# Altium PCB Main_PCB.PcbDoc
Units mm, origin at the board's own origin, x right, y up, seen from the top; angles counter-clockwise.
Board outline 55 x 55 mm, 2 copper layers (Top Layer, Bottom Layer), stack 1.58 mm thick; 49 components, 43 nets, 226 pads, 14 vias.
Unrouted connection lines stored in the file: 8.
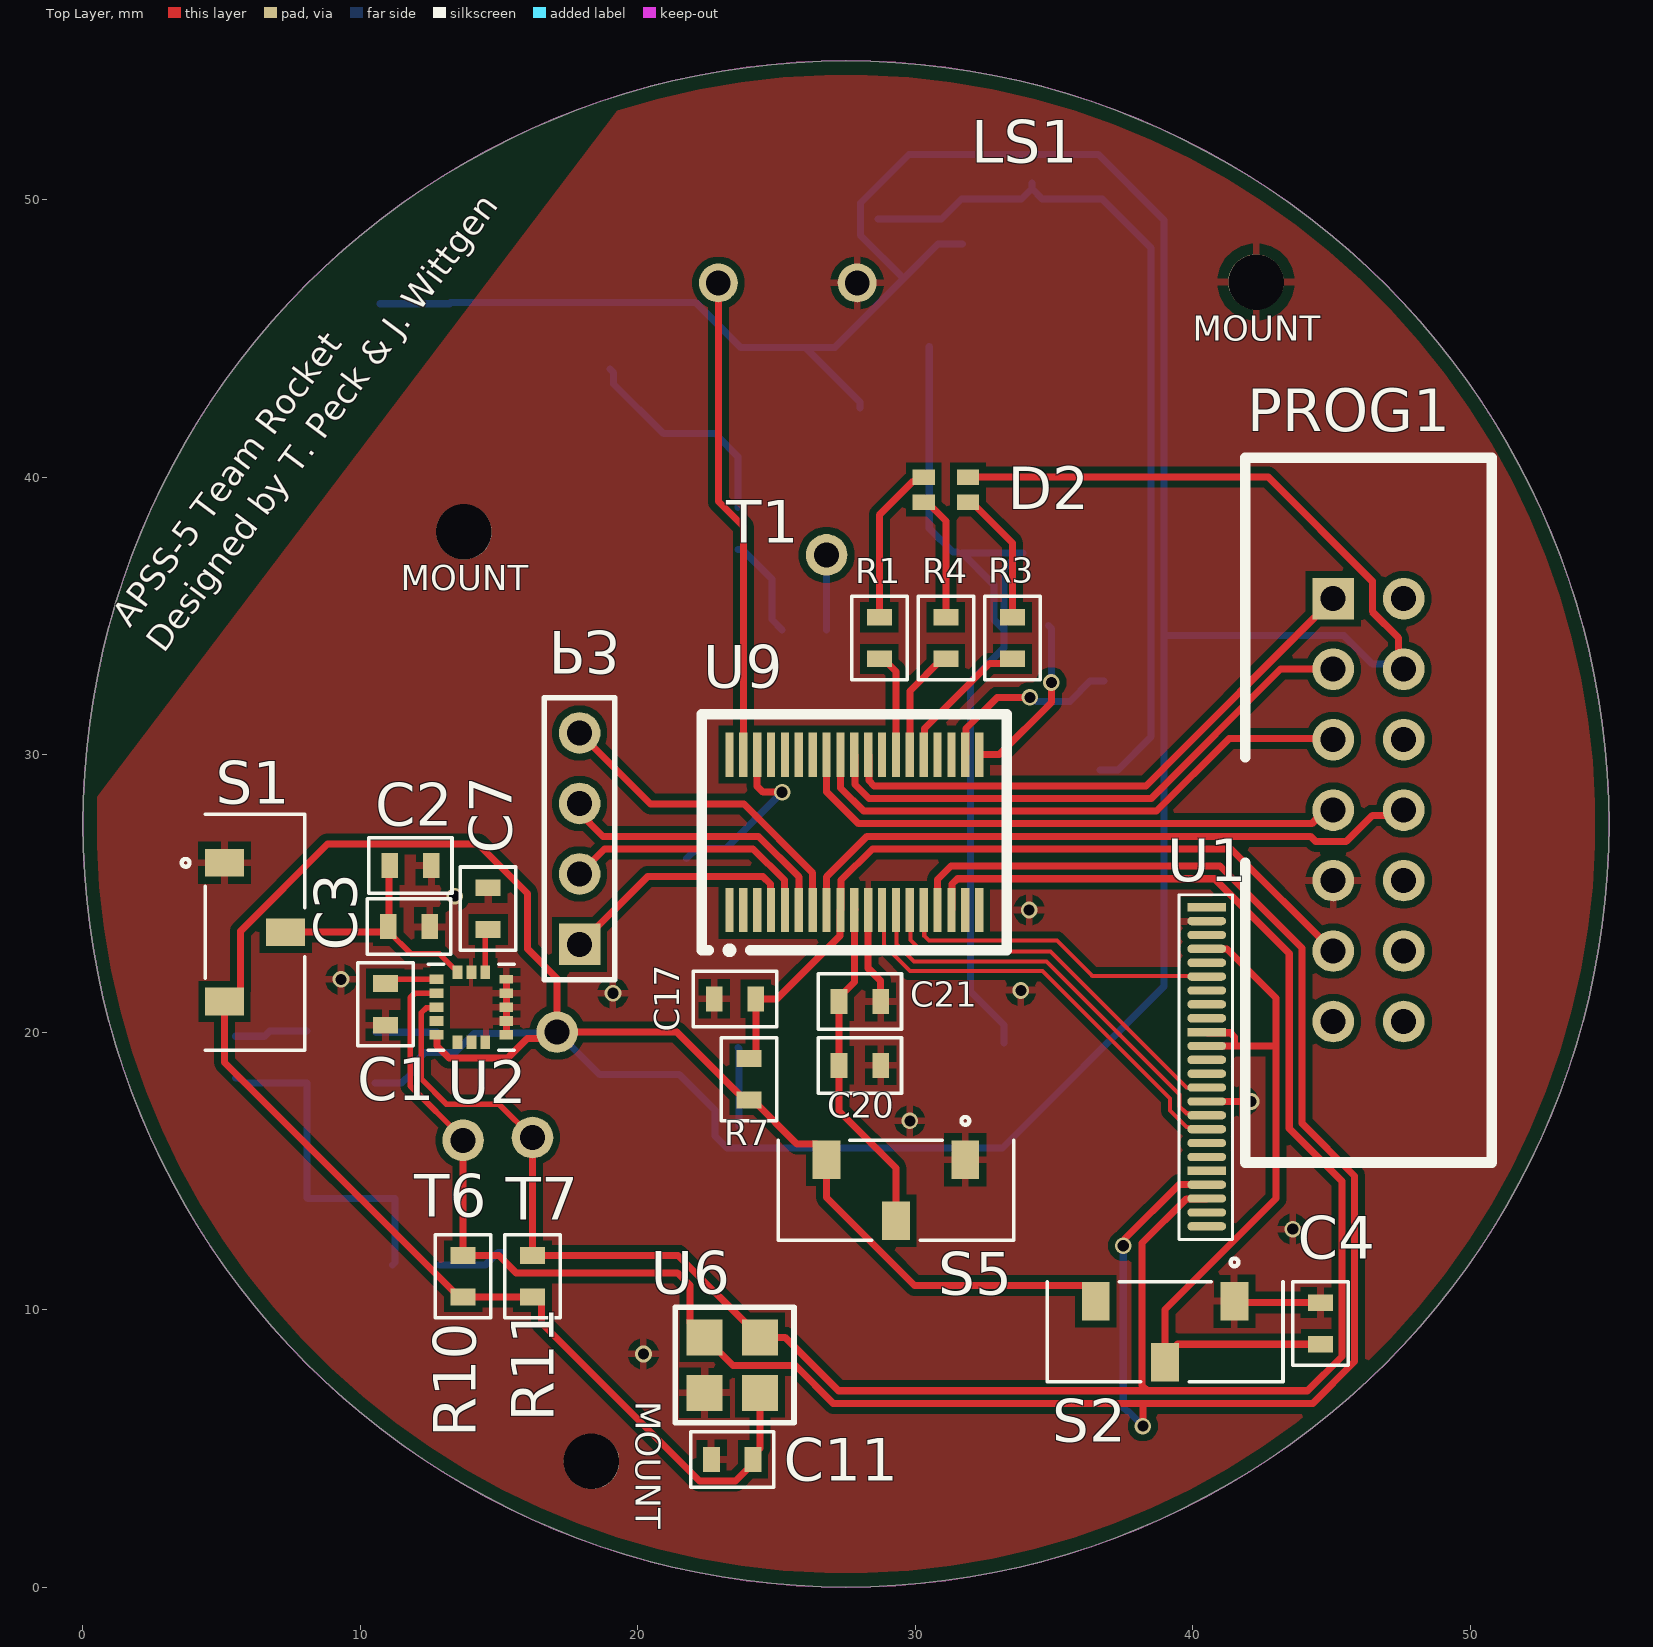
[diagram p0: Top Layer view]
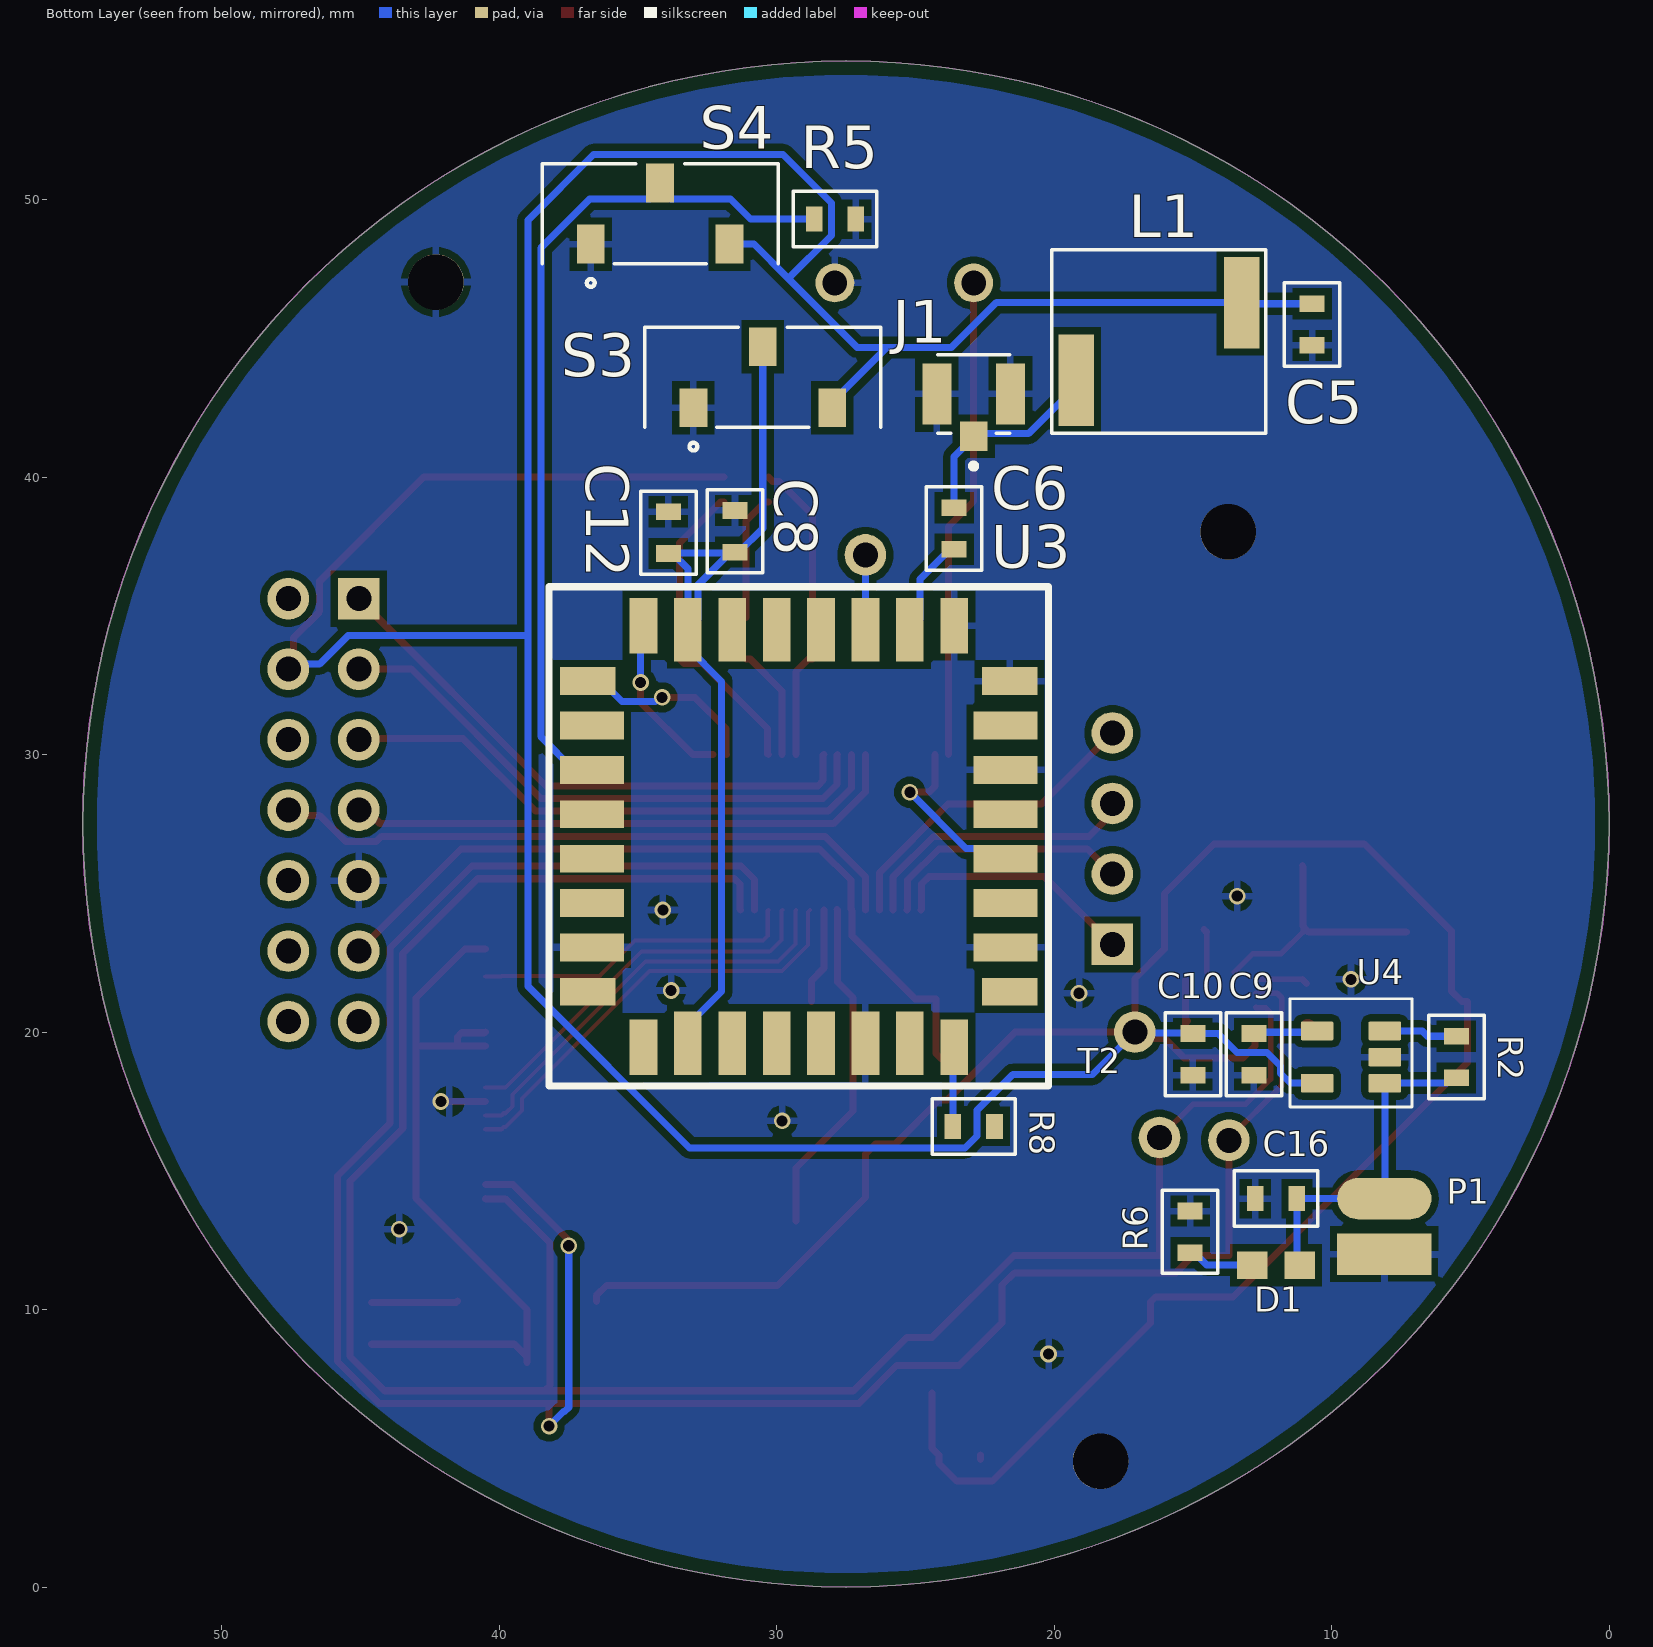
[diagram p1: Bottom Layer view, seen from below]

## Layer stack, top to bottom
Top Solder: solder mask 0.0102, Solder Resist, Dk 3.5
Top Layer: signal copper 0.0356
Dielectric 1: dielectric 1.5086, FR-4, Dk 4.8
Bottom Layer: signal copper 0.0356
Bottom Solder: solder mask 0.0102, Solder Resist, Dk 3.5

## Board outline
27.5,0 cw(c27.5,27.5) 0,27.5 cw(c27.5,27.5) 27.5,55 cw(c27.5,27.5) 55,27.5 cw(c27.5,27.5)

## Design rules (kind name [scope] priority, off if disabled: settings)
BoardOutlineClearance [All] p1: gap=0.5 ignorepadtopadclearanceinfootprint=FALSE
Clearance [All] p1: gap=0.254 ignorepadtopadclearanceinfootprint=FALSE except(0: Arc-Hole Track-Hole SMDPad-Hole THPad-Hole Via-Hole Fill-Hole Poly-Hole Region-Hole Text-Hole; 0.15: SMDPad-SMDPad; 0.2: Arc-Arc Arc-Track Arc-SMDPad Track-Track Track-SMDPad)
ComponentClearance [All] p1: gap=0.254 collisioncheckmode=3 verticalgap=0 showdistances=FALSE
MinimumSolderMaskSliver [All] p1: minsoldermaskwidth=0.1
PolygonConnect [All] p1: connectstyle=Relief reliefconductorwidth=0.254 reliefentries=4 polygonreliefangle="90 Angle" airgapwidth=0.254
RoutingVias [All] p1: holewidth=0.711 width=1.27 viastyle="Through Hole" minholewidth=0.711 minwidth=1.27 maxholewidth=0.711 maxwidth=1.27
SilkToSilkClearance [All] p1: silktosilkclearance=0.1
SilkToSolderMaskClearance [IsPad] p1: minsilkscreentomaskgap=0.1 clearancetoexposedcopper=TRUE
SolderMaskExpansion [All] p1: expansion=0.102 istentingtop=FALSE
Width [All] p1: maxlimit=0.5 minlimit=0.15 preferedwidth=0.254 bottomlayer_maxwidth=0.254 minimp=50.000000 maximp=50.000000 favimp=50.000000
26 further rules are at their usual default settings.

## Classes and differential pairs
component class GNNS_Module: C5 C6 C8 C12 J1 L1 R5 R8 S3 S4 T1 U3
component class Microcontroller: C1 C2 C3 C4 C7 C9 C10 C11 C16 C17 C20 C21 D1 LS1 P1 P3 PROG1 R1 R2 R3 R4 R6 R7 R10 R11 S1 S2 S5 T2 T6 T7 U1 U2 U4 U6 U9

## Components (designator, comment, footprint, x,y, rotation, side; value= is the part's Value field where it differs from the comment)
C1 "C-n-010.000-5-0603" "0603 (Capacitor)" 10.9,21 r270 top value=10nF
C2 "C-n-001.000-5-0603" "0603 (Capacitor)" 11.8,26 r0 top value=1uF
C3 "C-n-001.000-5-0603" "0603 (Capacitor)" 11.75,23.8 r0 top value=2.2uF
C4 "C-n-100.000-10-0603" "0603 (Capacitor)" 44.6,9.5 r270 top value=100nF
C5 "C-p-012.000-2-0603" "0603 (Capacitor)" 10.7,45.5 r270 bottom value=27pF
C6 "C-p-012.000-2-0603" "0603 (Capacitor)" 23.6,38.15 r270 bottom value=27pF
C7 "C-n-010.000-5-0603" "0603 (Capacitor)" 14.6,24.45 r90 top value=0.47uF
C8 "C-n-010.000-5-0603" "0603 (Capacitor)" 31.5,38.05 r90 bottom value=2.2uF
C9 "C-n-001.000-5-0603" "0603 (Capacitor)" 12.8,19.2 r270 bottom value=22nF
C10 "C-n-001.000-5-0603" "0603 (Capacitor)" 15,19.2 r270 bottom value=1uF
C11 "C-n-010.000-5-0603" "0603 (Capacitor)" 23.4,4.6 r180 top value=10nF
C12 "C-n-001.000-5-0603" "0603 (Capacitor)" 33.9,38 r90 bottom value=0.1uF
C16 "C-n-001.000-5-0603" "0603 (Capacitor)" 12,14 r0 bottom value=1uF
C17 "C-n-002.200-5-0603" "0603 (Capacitor)" 23.5,21.2 r180 top value=2.2nF
C20 "C-n-001.000-5-0603" "0603 (Capacitor)" 28,18.8 r0 top value=10uF
C21 "C-n-100.000-10-0603" "0603 (Capacitor)" 28,21.1 r0 top value=100nF
D1 "LTST-C194TBKT" 0603 12,11.6 r180 bottom
D2 "EAST1616RGBB4" "EAST1616RGBB4 - DUPLICATE1" 31.1,39.55 r0 top
J1 "CONUFL001-SMD-T" "ANTENNA- CONUFL001-SMD-T" 22.9,43 r180 bottom
L1 "L-n-027.000-5-0402" 4426R-9 13.24,46.29 r270 bottom value=27nH
LS1 "PS1440P02BT" BUZZER_PS1440P02BT 25.4,47 r90 top
P1 "Header 2" "BATTERY CONNECTOR- 620102131822" 8.1,12 r90 bottom
P3 "SD Breakout" HDR1X4 17.9,23.16 r90 top
PROG1 "MSP430 Programming Header" "TE 2-1761603-5" 46.33,28 r90 top
R1 "R-k-010.000-1-0603" "0603 (Resistor)" 28.7,34.2 r90 top value=60
R2 "R-k-100.000-1-0603" "0603 (Resistor)" 5.5,19.1 r270 bottom value=100k
R3 "R-k-010.000-1-0603" "0603 (Resistor)" 33.5,34.2 r90 top value=10
R4 "R-k-010.000-1-0603" "0603 (Resistor)" 31.1,34.2 r90 top value=10
R5 "R-k-100.000-1-0603" "0603 (Resistor)" 27.9,49.3 r180 bottom value=100k
R6 "R-k-001.500-1-0603" "0603 (Resistor)" 15.1,12.8 r270 bottom value=20
R7 "R-k-047.000-1-0603" "0603 (Resistor)" 24,18.3 r90 top value=47k
R8 "R-k-010.000-1-0603" "0603 (Resistor)" 22.9,16.6 r180 bottom value=10k
R10 "R-k-010.000-1-0603" "0603 (Resistor)" 13.7,11.2 r270 top value=10k
R11 "R-k-010.000-1-0603" "0603 (Resistor)" 16.2,11.2 r270 top value=10k
S1 "JS102011JCQN" SW_JS102011JCQN 6.2,23.6 r270 top
S2 "JS102011JCQN" SW_JS102011JCQN 39,9.2 r180 top
S3 "JS102011JCQN" SW_JS102011JCQN 30.5,43.6 r180 bottom
S4 "JS102011JCQN" SW_JS102011JCQN 34.2,49.5 r180 bottom
S5 "JS102011JCQN" SW_JS102011JCQN 29.3,14.3 r180 top
T1 "Open Pad" "OPEN PAD" 26.8,37.2 r0 top
T2 "Open Pad" "OPEN PAD" 17.088,20 r180 bottom
T6 "Open Pad" "OPEN PAD" 13.7,16.1 r0 top
T7 "Open Pad" "OPEN PAD" 16.2,16.2 r0 top
U1 "Camera" SFV24R-2STE1HLF 40.5,24.5 r270 top
U2 "ICM-20608-G" ICM-20608-G 14,20.9 r0 top
U3 "SE878K3-A" "GNSS MODULE" 29.2,27.05 r180 bottom
U4 "RT9193-30GB" RT9193-33GB 9.3,19.1 r0 bottom
U6 "MS563702BA03-50" MS5837-30BA 24.4,9 r0 top
U9 "MSP430FR2355 38-TFSOP" "MSP430FR2355 38-TFSOP" 27.8,27.2 r0 top

## Footprints (in the part's own frame and the unit in brackets; to place one, negate y for a bottom-side part, rotate by r counter-clockwise, add the part's x,y. Pads: shape width x height; smd on the part's side, far side on the other; paste and mask are expansions set on the pad)
0603 [mm]
  rect 1.1x1 smd: 1(-0.85,0) 2(0.85,0)
"0603 (Capacitor)" [mm]
  rect 0.6x0.9 smd mask+0.05: 1(-0.75,0) 2(0.75,0)
  silkscreen extent -1.5,-1 1.5,1, body extent -0.77,-0.42 0.78,0.43, height 0.45
"0603 (Resistor)" [mm]
  rect 0.6x0.9 smd mask+0.05: 1(-0.75,0) 2(0.75,0)
  silkscreen extent -1.5,-1 1.5,1, body extent -0.77,-0.42 0.78,0.43, height 0.45
4426R-9 [mm] "Inductor"
  rect 3.3x1.27 smd: 1(0,0) 2(2.79,-5.96)
  silkscreen extent -1.9,-6.85 4.7,0.87
"ANTENNA- CONUFL001-SMD-T" [mm]
  rect 1x1.05 smd: 1(0,-1.525)
  rect 1.05x2.2 smd: 2(-1.325,0) 3(1.325,0)
  silkscreen extent -1.3,-2.7 1.3,1.42
"BATTERY CONNECTOR- 620102131822" [mm]
  rect 1.5x3.4 smd: 1(0,0)
  oval 1.5x3.4 smd: 2(2,0)
BUZZER_PS1440P02BT [mm]
  round 1.398 hole 0.89: 1(0,2.5) 2(0,-2.5)
"EAST1616RGBB4 - DUPLICATE1" [mm]
  rect 0.8x0.55 smd: 1(-0.8,-0.45) 2(-0.8,0.45) 3(0.8,0.45) 4(0.8,-0.45)
"GNSS MODULE" [mm]
  rect 2x1 smd mask+0.1: 1(-7.6,5.6) 8(-7.6,-5.6) 17(7.6,-5.6) 24(7.6,5.6)
  rect 2.3x1 smd mask+0.1: 2(-7.45,4) 3(-7.45,2.4) 4(-7.45,0.8) 5(-7.45,-0.8) 6(-7.45,-2.4) 7(-7.45,-4) 18(7.45,-4) 19(7.45,-2.4) 20(7.45,-0.8) 21(7.45,0.8) 22(7.45,2.4) 23(7.45,4)
  rect 1x2 smd mask+0.1: 9(-5.6,-7.6) 16(5.6,-7.6) 25(5.6,7.6) 32(-5.6,7.6)
  rect 1x2.3 smd mask+0.1: 10(-4,-7.45) 11(-2.4,-7.45) 12(-0.8,-7.45) 13(0.8,-7.45) 14(2.4,-7.45) 15(4,-7.45) 26(4,7.45) 27(2.4,7.45) 28(0.8,7.45) 29(-0.8,7.45) 30(-2.4,7.45) 31(-4,7.45)
  silkscreen extent -9,-9 9,9, body extent -9,-9 9,9, height 6.2
HDR1X4 [mm] "Connector; Header; 4 Position"
  rect 1.5x1.5 hole 0.9: 1(0,0)
  round 1.5 hole 0.9: 2(2.54,0) 3(5.08,0) 4(7.62,0)
  silkscreen extent -1.27,-1.27 8.89,1.27
ICM-20608-G [mm]
  rect 0.49x0.35 smd: 1(-1.26,1) 2(-1.26,0.5) 3(-1.26,0) 4(-1.26,-0.5) 5(-1.26,-1) 9(1.26,-1) 10(1.26,-0.5) 11(1.26,0) 12(1.26,0.5)
  rect 0.35x0.49 smd: 6(-0.5,-1.26) 7(0,-1.26) 8(0.5,-1.26) 14(0.5,1.26) 15(0,1.26) 16(-0.5,1.26)
  rect 0.49x0.3 smd: 13(1.26,1)
  silkscreen extent -1.55,-1.55 1.55,1.55, body extent -1.5,-1.5 1.5,1.5, height 0.8
MS5837-30BA [mm]
  rect 1.3x1.3 smd: 1(-2,0) 2(-2,-2) 3(0,-2) 4(0,0)
  silkscreen extent -3.05,-3.08 1.22,1.07
"MSP430FR2355 38-TFSOP" [mm]
  rect 0.3x1.6 smd paste-0.025 mask+0.05: 1(-4.5,-2.8) 2(-4,-2.8) 3(-3.5,-2.8) 4(-3,-2.8) 5(-2.5,-2.8) 6(-2,-2.8) 7(-1.5,-2.8) 8(-1,-2.8) 9(-0.5,-2.8) 10(0,-2.8) 11(0.5,-2.8) 12(1,-2.8) 13(1.5,-2.8) 14(2,-2.8) 15(2.5,-2.8) 16(3,-2.8) 17(3.5,-2.8) 18(4,-2.8) 19(4.5,-2.8) 20(4.5,2.8) 21(4,2.8) 22(3.5,2.8) 23(3,2.8) 24(2.5,2.8) 25(2,2.8) 26(1.5,2.8) 27(1,2.8) 28(0.5,2.8) 29(0,2.8) 30(-0.5,2.8) 31(-1,2.8) 32(-1.5,2.8) 33(-2,2.8) 34(-2.5,2.8) 35(-3,2.8) 36(-3.5,2.8) 37(-4,2.8) 38(-4.5,2.8)
  silkscreen extent -5.5,-4.37 5.5,4.25, body extent -4.9,-2.2 4.9,2.2, height 1.2
"OPEN PAD" [mm]
  round 1.5 hole 0.9: 1(0,0)
RT9193-33GB [mm]
  rrect12% 1.17x0.67 smd: 1(-1.22,0.94) 2(-1.22,0) 3(-1.22,-0.94) 4(1.22,-0.94) 5(1.22,0.94)
  silkscreen extent -2.2,-2.1 2.2,1.8
SFV24R-2STE1HLF [mm]
  rect 0.3x1.4 smd: 1(0,0) 10(4.5,0) 20(9.5,0)
  oval 0.3x1.4 smd: 2(0.5,0) 3(1,0) 4(1.5,0) 5(2,0) 6(2.5,0) 7(3,0) 8(3.5,0) 9(4,0) 11(5,0) 12(5.5,0) 13(6,0) 14(6.5,0) 15(7,0) 16(7.5,0) 17(8,0) 18(8.5,0) 19(9,0) 21(10,0) 22(10.5,0) 23(11,0) 24(11.5,0)
  silkscreen extent -0.45,-1 11.98,0.92
SW_JS102011JCQN [mm]
  rect 1x1.4 smd: 1(-2.5,-1.1) 2(0,1.1) 3(2.5,-1.1)
  silkscreen extent -4.25,-2.64 4.25,1.8
"TE 2-1761603-5" [mm] "14 Pin, 100mm, 2 Row"
  rect 1.5x1.5 hole 0.9 mask-0.1: 1(7.62,1.27)
  round 1.5 hole 0.9 mask-0.1: 2(7.62,-1.27) 3(5.08,1.27) 4(5.08,-1.27) 5(2.54,1.27) 6(2.54,-1.27) 7(0,1.27) 8(0,-1.27) 9(-2.54,1.27) 10(-2.54,-1.27) 11(-5.08,1.27) 12(-5.08,-1.27) 13(-7.62,1.27) 14(-7.62,-1.27)
  silkscreen extent -12.7,-4.45 12.7,4.45, body extent -12.7,-4.78 12.7,4.45, height 8.9

## Part data
C1 C11: "Capacitor 10nF 0603 +/-5%", Case/Package=0603, Manufacturer=Murata, Manufacturer PartNo=GRM1885C1H103JA01D, Tolerance=+/-5%
C2 C10 C16: "Capacitor 1uF 0603 +/-5%", Case/Package=0603, Manufacturer=Murata, Manufacturer PartNo=GCM1885C2A102JA16D, Tolerance=+/-5%
C3: "Capacitor 2,2uF 0603 +/-5%", Case/Package=0603, Manufacturer=Murata, Manufacturer PartNo=GCM1885C2A102JA16D, Tolerance=+/-5%
C4 C21: "Capacitor 100nF 0603 +/-10%", Case/Package=0603, Manufacturer=Murata, Manufacturer PartNo=GRM188R72A104KA35D, Tolerance=+/-10%
C5 C6: "Capacitor 12pF 0603 +/-2%", Case/Package=0603, Manufacturer=Murata, Manufacturer PartNo=GQM1875C2E120GB12D, Tolerance=+/-2%
C7: "Capacitor 0.47uF 0603 +/-5%", Case/Package=0603, Manufacturer=Murata, Manufacturer PartNo=GRM1885C1H103JA01D, Tolerance=+/-5%
C8: "Capacitor 2.2uF 0603 +/-5%", Case/Package=0603, Manufacturer=Murata, Manufacturer PartNo=GRM1885C1H103JA01D, Tolerance=+/-5%
C9: "Capacitor 22nF 0603 +/-5%", Case/Package=0603, Manufacturer=Murata, Manufacturer PartNo=GCM1885C2A102JA16D, Tolerance=+/-5%
C12: "Capacitor 0.1uF 0603 +/-5%", Case/Package=0603, Manufacturer=Murata, Manufacturer PartNo=GCM1885C2A102JA16D, Tolerance=+/-5%
C17: library part C-n-001.000-5-0603, "Capacitor 2.2nF 0603 +/-5%", Case/Package=0603, Manufacturer=Murata, Manufacturer PartNo=GCM1885C2A102JA16D, Tolerance=+/-5%
C20: "Capacitor 10uF 0603 +/-5%", Case/Package=0603, Manufacturer=Murata, Manufacturer PartNo=GCM1885C2A102JA16D, Tolerance=+/-5%
D1: "Blue 468nm LED Indication - Discrete 3.3V 0603 _1608 Metric_", Package="0603 Lite-On", Digi-Key_Part_Number=160-1837-1-ND, Digi-Key_Purchase_URL=https://www.digikey.com/product-detail/en/lite-on-inc/LTST-C194TBKT/160-1837-1-ND/2356236?utm_source=snapeda&utm_medium=aggregator&utm_campaign=symbol, MF="Lite-On Inc.", MP=LTST-C194TBKT, SnapEDA_Link=https://www.snapeda.com/parts/LTST-C194TBKT/Lite-On%20Inc./view-part/426592/?ref=snap
J1: Package=None, Availability=Unavailable, MP=CONUFL001-SMD-T, Price=None
L1: "Inductor 27nH 0402 +/-5%", Case/Package=0402, Manufacturer=Murata, Manufacturer PartNo=LQG15HS27NJ02D, Tolerance=+/-5%
LS1: "Buzzers Transducer, Externally Driven Piezo 3V 4kHz 75dB @ 3V, 10cm Through Hole PC Pins", Package="SOP-8 TDK", Digi-Key_Part_Number=445-5242-1-ND, Digi-Key_Purchase_URL=https://www.digikey.com/product-detail/en/tdk-corporation/PS1440P02BT/445-5242-1-ND/2236832?utm_source=snapeda&utm_medium=aggregator&utm_campaign=symbol, MF=TDK, MP=PS1440P02BT, SnapEDA_Link=https://www.snapeda.com/parts/PS1440P02BT/TDK/view-part/295705/?ref=snap
P1: "Header, 2-Pin", LatestRevisionDate=17-Jul-2002, LatestRevisionNote="Re-released for DXP Platform.", Publisher="Altium Limited"
P3: library part "Header 4", "Header, 4-Pin", LatestRevisionDate=17-Jul-2002, LatestRevisionNote="Re-released for DXP Platform.", Publisher="Altium Limited"
PROG1: "14 Pin JTAG Header for MSP430 Debug Probe", Manufacturer="TE Connectivity", Manufucturer PartNo=2-1761603-5
R1: "Resistor 60 0603 +/-1%", Case/Package=0603, Manufacturer="Vishay Dale", Manufacturer PartNo=CRCW060310K0FKEAHP, Tolerance=+/-1%
R2 R5: "Resistor 100k 0603 +/-1%", Case/Package=0603, Manufacturer="Vishay Dale", Manufacturer PartNo=CRCW0603100KFKEAHP, Tolerance=+/-1%
R3 R4: "Resistor 10 0603 +/-1%", Case/Package=0603, Manufacturer="Vishay Dale", Manufacturer PartNo=CRCW060310K0FKEAHP, Tolerance=+/-1%
R6: "Resistor 20 0603 +/-1%", Case/Package=0603, Manufacturer="Vishay Dale", Manufacturer PartNo=CRCW06031K50FKEAHP, Tolerance=+/-1%
R7: library part R-k-068.000-1-0603, "Resistor 47k 0603 +/-1%", Case/Package=0603, Manufacturer="Vishay Dale", Manufacturer PartNo=CRCW060368K0FKEAHP, Tolerance=+/-1%
R8 R10 R11: "Resistor 10k 0603 +/-1%", Case/Package=0603, Manufacturer="Vishay Dale", Manufacturer PartNo=CRCW060310K0FKEAHP, Tolerance=+/-1%
S1 S2 S3 S4 S5: "Switch Slide Spdt 300ma 6v", Package=None, Availability=Unavailable, MP=JS102011JCQN, Price=None
U2: "Accelerometer, Gyroscope, 6 Axis Sensor IÂ²C, SPI Output", Package="LGA-16 InvenSense", Availability=Good, MF="TDK InvenSense", MP=ICM-20608-G, Price=None, Purchase-URL=https://pricing.snapeda.com/search/part/ICM-20608-G/?ref=eda, SnapEDA_Link=https://www.snapeda.com/parts/ICM-20608-G/TDK%20InvenSense/view-part/196551/?ref=snap
U3: "GNSS L1 Antenna module (GPS, Galileo, Glonass, BeiDou)", Package="NON-STANDARD-32 Telit", Availability="Not in stock", Check_prices=https://www.snapeda.com/parts/SE878K3-A/Telit/view-part/?ref=eda, MF=Telit, MP=SE878K3-A, Price=None, SnapEDA_Link=https://www.snapeda.com/parts/SE878K3-A/Telit/view-part/?ref=snap
U4: library part RT9193-33GB, "Linear Voltage Regulator IC 1 Output 300mA SOT-23-5", Package="SOT-23-5 Richtek", Availability=Unavailable, MF="Richtek USA", MP=RT9193-33GB, Price=None, SnapEDA_Link=https://www.snapeda.com/parts/RT9193-33GB/Richtek%20USA%20Inc./view-part/55570/?ref=snap
U6: library part MS5837-02BA21, "Pressure Sensor, Absolute, 2Bar, I2C", Case/Package=SMD/SMT, Manufacturer="TE Connectivity", Max Operating Temperature=85°C, Min Operating Temperature=-20°C, Operating Pressure=17.4PSI, ComponentLink1Description=https://www.te.com/commerce/DocumentDelivery/DDEController?Action=srchrtrv&amp;DocNm=MS5837-02BA01&amp;DocType=DS&amp;DocLang=English&src-supplier=Digi-Key, ComponentLink1URL=https://www.te.com/commerce/DocumentDelivery/DDEController?Action=srchrtrv&amp;DocNm=MS5837-02BA01&amp;DocType=DS&amp;DocLang=English&src-supplier=Digi-Key, Manufacturer Part Number=MS5837-02BA21, Max Pressure=145.04PSI, Output Type=I2C, Port Style="No Port", Pressure Type=Absolute, Pricing 1="1=12.98000, 5=11.38800, 10=10.24900, 25=9.11040, 50=8.42700, 100=7.28820, 500=6.83264, 1000=6.37714 (USD)", RoHS=No, RoHS Compliant=Yes, Stock 1=5173, Supplier 1=Digi-Key, Termination=SMD/SMT
U9: "MSP430 Microcontroller", Manufacturer="Texas Instruments", Manufacturer Part Number=MSP430FR2355TDBTR

## Free pads (board coordinates)
  round 2 hole 2: MOUNTING(13.727,38.027) MOUNTING(18.327,4.527) MOUNTING(42.278,47.034)

## Via types
v1: diameter 0.6, hole 0.4, Top Layer to Bottom Layer, 14 vias

## Nets (pads, with @x,y where several pads share a name; then routed paths per layer and width w, separated by ;. In a path a pad name is that pad's centre, name@x,y a point inside that pad or via, vN(x,y) a via of type N, cw(c..) or ccw(c..) an arc to the next point about the centre after c; other vN are vias at no path point)
3v0: C5.1 C10.1 C11.1 D2.4 L1.1 PROG1.4 R7.1 R10.2 R11.2 S1.3 S2.3 S3.3 S4.3 S5.3 T2.1 U2.5 U4.5 U6.1 | length 213.7
  Top Layer w0.254: U2.5@12.757,19.852 12.765,19.852 12.765,19.493 13.19,19.068 15.31,19.068 16.004,19.762 16.85,19.762 T2.1 ; 24.4,7 24.4,5 24.15,4.75 C11.1 24.15,4.45 23.523,3.823 22.215,3.823 16.523,9.515 16.523,10.277 16.35,10.45 R11.2 R10.2 13.55,10.45 5.1,18.9 S1.3 5.3,21.1 5.673,21.473 5.673,23.635 8.815,26.777 14.235,26.777 16.018,24.995 16.018,23.003 17.088,21.933 T2.1 ; 31.9,40 42.719,40 46.469,36.25 46.469,35.152 47.41,34.211 47.41,33.27 PROG1.4 ; S2.3 36.5,10.5 36.127,10.873 29.965,10.873 26.8,14.038 S5.3 26.8,15.6 26.427,15.973 25.727,15.973 24.15,17.55 R7.1 23.85,17.55 21.4,20 T2.1
  Bottom Layer w0.254: U4.5 11.486,18.16 11.839,18.513 11.839,18.778 12.33,19.269 13.408,19.269 14.089,19.95 C10.1 15.2,19.95 15.225,19.975 16.675,19.975 T2.1@16.7,20 ; C5.1 13.2,46.25 L1.1 22.083,46.29 23.691,44.681 26.019,44.681 ; T2.1 18.615,18.474 21.489,18.474 22.777,17.185 22.777,16.261 23.215,15.823 33.135,15.823 38.954,21.642 38.954,34.3 ; S3.3 28,42.7 26.019,44.681 ; S4.3 30.819,48.4 29.583,47.164 29.583,47.156 ; PROG1.4 47.41,33.27 46.469,33.27 45.439,34.3 38.954,34.3 ; 26.019,44.681 27.109,44.681 29.583,47.156 ; 29.583,47.156 29.582,47.156 28.023,48.715 28.023,49.885 29.765,51.627 36.601,51.627 38.954,49.274 38.954,34.3
CAM_D0: U1.14 U9.14 | length 14
  Top Layer w0.15: U9.14 29.823,24.377 29.823,23.323 30.245,22.9 34.875,22.9 39.767,18.009 40.491,18.009 U1.14
CAM_HSYNC: U1.16 U9.13 | length 15.2
  Top Layer w0.15: U9.13 29.323,24.377 29.323,23.18 29.953,22.55 34.73,22.55 39.525,17.755 39.525,17.324 39.774,17.075 39.787,17.075 39.834,17.075 39.909,17 U1.16
CAM_PCLK: U1.17 U9.12 | length 15.9
  Top Layer w0.15: U9.12 28.875,24.325 28.875,23.133 29.808,22.2 34.585,22.2 39.175,17.61 39.175,17.174 39.774,16.575 39.787,16.575 39.834,16.575 39.909,16.5 U1.17
CAM_VSYNC: U1.6 U9.15 | length 11.7
  Top Layer w0.15: U9.15 30.323,24.377 30.323,23.465 30.488,23.3 35.1,23.3 36.377,22.023 39.894,22.023 39.915,22.023 39.938,22 U1.6
GND: C1.2 C2.2 C3.2 C4.1 C5.2 C7.2 C8.2 C9.2 C10.2 C11.2 C12.2 C16.2 C17.2 C20.2 C21.2 J1.2 J1.3 LS1.2 P1.1 pad.MOUNTING PROG1.9 R5.2 R6.1 S1.1 S2.1 S3.1 S4.1 S5.1 U1.2 U1.15 U2.8 U2.9 U2.10 U2.11 U2.12 U2.13 U2.15 U3.7 U3.14 U3.18 U3.22 U3.24 U3.25 U4.2 U6.4 U9.11 | length 10.5
  Top Layer w0.254: C1.2@10.875,20.225 C1.2 ; U2.10@15.19,20.4 U2.10 ; U2.9 U2.10 ; U2.13 U2.12 U2.11 U2.10 ; C11.2 C11.2@22.65,4.75 ; U9.11 28.3,22.3 28.75,21.85 C21.2 ; U1.15 v1(42.1,17.5) ; S2.1 41.55,10.25 C4.1
  Top Layer w0.5: C1.2@10.819,20.2 10.844,20.225 C1.2@10.875,20.225
  other v1: 20.2,8.4 43.6,12.9 29.8,16.8 19.1,21.4 33.8,21.5 9.3,21.9 34.1,24.4 13.4,24.9
JTAG_RST: C17.1 PROG1.11 R7.2 U9.9 | length 28
  Top Layer w0.254: R7.2 24.077,19.05 24.25,19.223 C17.1 25.012,21.2 27.277,23.465 27.277,24.377 27.323,24.423 27.323,25.477 28.449,26.603 41.377,26.603 PROG1.11
JTAG_TEST: PROG1.8 U9.8 | length 23.1
  Top Layer w0.254: U9.8 26.8,25.597 28.26,27.057 31.262,27.057 44.243,27.057 44.431,26.869 45.528,26.869 46.469,27.81 47.41,27.81 PROG1.8
NetC1_1: C1.1 U2.1 | length 1.9
  Top Layer w0.2: C1.1@11.05,21.9 U2.1
  Top Layer w0.254: C1.1 C1.1@11.05,21.9
NetC2_1: C2.1 C3.1 S1.2 U2.16 | length 9.3
  Top Layer w0.2: C3.1@11,23.65 11.831,22.818 12.841,22.818 U2.16
  Top Layer w0.254: S1.2 10.827,23.6 C3.1@11,23.773 ; C3.1@11,23.65 C3.1@11,23.773 ; C2.1 11.025,25.975 11.025,23.825 C3.1 C3.1@11,23.773
NetC4_2: C4.2 S2.2 U1.4 U1.10 U1.11 | length 27.7
  Top Layer w0.254: S2.2 S2.2@39,8.3 ; U1.11 41.5,19.5 ; U1.10 40.523,19.977 41.351,19.977 41.5,19.828 41.5,19.5 ; U1.4 40.509,22.991 41.233,22.991 43,21.225 43,19.5 ; C4.2 39.45,8.75 S2.2@39,8.3 ; S2.2@39,8.3 39,10 43,14 43,19.5 ; 41.5,19.5 43,19.5
NetC6_1: C6.1 J1.1 L1.2 | length 8
  Bottom Layer w0.254: L1.2@19,43.9 19.123,43.777 19.123,43.365 20.915,41.573 22.802,41.573 J1.1 22.9,41.45 23.6,40.75 C6.1
NetC6_2: C6.2 U3.26 | length 3.7
  Bottom Layer w0.254: C6.2 23.75,37.4 24.827,36.323 24.827,34.873 U3.26
NetC7_1: C7.1 U2.14 | length 1.6
  Top Layer w0.2: U2.14 C7.1@14.5,23.6
  Top Layer w0.254: C7.1@14.5,23.6 C7.1
NetC8_1: C8.1 C12.1 S3.2 U3.10 U3.31 | length 32.4
  Bottom Layer w0.254: S3.2 30.5,38.15 31.35,37.3 C8.1 ; U3.10 33.2,20.25 31.984,21.466 31.984,32.634 33.2,33.85 U3.31 ; C12.1@33.75,37.25 33.2,36.7 U3.31 ; C12.1@33.875,37.275 31.675,37.275 32.827,36.123 32.827,34.873 U3.31
NetC9_1: C9.1 U4.4 | length 2.2
  Bottom Layer w0.254: U4.4@10.565,19.995 C9.1@12.755,19.995
NetC16_1: C16.1 D1.2 P1.2 R2.2 U4.1 | length 12.4
  Bottom Layer w0.254: R2.2 5.65,18.35 5.84,18.16 U4.1 8.08,14.02 P1.2 C16.1 11.25,11.7 D1.2
NetC20_1: C20.1 C21.1 S5.2 U9.10 | length 12.3
  Top Layer w0.254: U9.10@27.823,24.423 U9.10 27.8,21.8 27.25,21.25 C21.1 C20.1 27.25,17.15 29.3,15.1 S5.2
NetD1_1: D1.1 R6.2 | length 2.4
  Bottom Layer w0.254: D1.1 14.5,11.6 14.95,12.05 R6.2
NetD2_1: D2.1 R1.2 | length 5.9
  Top Layer w0.254: R1.2 28.7,38.637 29.915,39.852 30.152,39.852 30.3,40
NetD2_2: D2.2 R4.2 | length 4.6
  Top Layer w0.254: 30.3,39.1 30.425,39.1 31.1,38.425 R4.2
NetD2_3: D2.3 R3.2 | length 4.9
  Top Layer w0.254: 31.9,39.1 32.025,39.1 33.5,37.625 R3.2
NetLS1_1: LS1.1 U9.37 | length 17.4
  Top Layer w0.254: LS1.1 22.9,39.12 23.8,38.22 U9.37
NetP3_1: P3.1 U9.4 | length 8.9
  Top Layer w0.254: P3.1 20.34,25.6 24.512,25.6 24.777,25.335 24.777,25.193 24.777,24.423 U9.4
NetP3_2: P3.2 U9.5 | length 9.3
  Top Layer w0.254: P3.2 18.8,26.6 24.154,26.6 25.277,25.477 25.277,24.423 U9.5
NetP3_3: P3.3 U9.6 | length 10.4
  Top Layer w0.254: P3.3 17.9,27.903 18.276,27.527 18.276,27.524 18.746,27.054 24.343,27.054 25.8,25.597 U9.6
NetP3_4: P3.4 U9.7 | length 11.8
  Top Layer w0.254: P3.4 20.459,28.221 23.818,28.221 26.3,25.739 U9.7
NetPROG1_1: PROG1.1 U9.28 | length 20.6
  Top Layer w0.254: U9.28 28.323,29.977 28.323,29.065 28.515,28.873 32.015,28.873 38.313,28.873 PROG1.1
NetPROG1_3: PROG1.3 U9.29 | length 20.5
  Top Layer w0.254: U9.29 27.823,29.977 27.823,28.922 28.326,28.419 31.826,28.419 38.501,28.419 43.162,33.08 PROG1.3
NetPROG1_5: PROG1.5 U9.30 | length 20.4
  Top Layer w0.254: U9.30 27.3,28.803 28.138,27.965 31.638,27.965 38.689,27.965 41.312,30.588 45.012,30.588 PROG1.5
NetPROG1_7: PROG1.7 U9.31 | length 20.3
  Top Layer w0.254: U9.31 26.8,28.661 27.95,27.511 31.45,27.511 44.288,27.511 44.777,28 PROG1.7
NetR1_1: R1.1 U9.26 | length 3.8
  Top Layer w0.254: R1.1 28.85,33.45 29.3,33 U9.26
NetR2_1: R2.1 U4.3 | length 2.7
  Bottom Layer w0.254: R2.1 6.541,19.85 6.731,20.04 U4.3
NetR3_1: R3.1 U9.24 | length 5.2
  Top Layer w0.254: U9.24 30.323,30.023 30.323,30.935 32.669,33.281 33.331,33.281 R3.1
NetR4_1: R4.1 U9.25 | length 4.1
  Top Layer w0.254: U9.25 29.8,32.3 30.95,33.45 R4.1
NetR5_1: R5.1 S4.2 U3.3 | length 31.4
  Bottom Layer w0.254: R5.1 30.938,49.3 31.665,50.027 33.827,50.027 S4.2@34.2,50.4 ; S4.2 S4.2@34.2,50.4 ; U3.3 37.3,29.45 38.5,30.65 38.5,48.262 36.735,50.027 34.573,50.027 S4.2@34.2,50.4
NetR8_1: R8.1 U3.16 | length 2.9
  Bottom Layer w0.254: U3.16 23.65,19.4 R8.1
NetR10_1: R10.1 T6.1 U1.21 U2.2 U6.3 U9.16 | length 89.9
  Top Layer w0.2: U2.2 11.956,21.4 11.795,21.239 11.795,18.066 T6.1@13.7,16.161
  Top Layer w0.254: T6.1@13.7,16.161 T6.1 R10.1 14.988,11.95 15.615,11.323 21.435,11.323 21.877,10.881 21.877,9.523 22.4,9 23.423,7.977 25.681,7.977 27.039,6.619 38.1,6.619 38.2,6.619 ; U9.16 30.8,25.5 31.281,25.981 40.973,25.981 43.929,23.025 43.929,16.715 45.831,14.813 45.831,8.127 44.323,6.619 38.2,6.619 ; v1(37.492,12.3) 37.558,12.366 37.558,12.558 39.5,14.5 U1.21 ; v1(38.2,5.8) 38.2,6.619
  Bottom Layer w0.254: v1(37.492,12.3) 37.492,6.47 37.641,6.321 37.679,6.321 v1(38.2,5.8)
NetR11_1: R11.1 T7.1 U1.22 U2.3 U6.2 U9.17 | length 81.9
  Top Layer w0.2: U2.3 12.715,20.875 12.371,20.875 12.195,20.699 12.195,18.305 13.1,17.4 15,17.4 T7.1
  Top Layer w0.254: T7.1 R11.1 21.45,11.95 24.4,9 25.3,9 27.227,7.073 38.365,7.073 ; U9.17 31.323,24.423 31.323,25.335 31.515,25.527 40.785,25.527 43.475,22.837 43.475,16.527 45.377,14.625 45.377,8.315 44.135,7.073 38.365,7.073 ; U1.22 40.491,13.991 39.767,13.991 38.173,12.398 38.173,7.265 38.365,7.073
NetT1_1: T1.1 U3.27 | length 2.7
  Bottom Layer w0.254: U3.27 T1.1
NetU3_1: U3.1 U9.21 | length 6.8
  Top Layer w0.254: U9.21 31.823,30.023 31.823,30.935 32.95,32.063 v1(34.125,32.063)
  Bottom Layer w0.254: v1(34.125,32.063) 34.218,32.063 34.362,31.919 35.569,31.919 36.3,32.65 U3.1
NetU3_20: U3.20 U9.36 | length 6.6
  Top Layer w0.254: U9.36 24.3,28.849 24.503,28.646 v1(25.2,28.646)
  Bottom Layer w0.254: U3.20 22.123,26.623 23.177,26.623 v1(25.2,28.646)
NetU3_32: U3.32 U9.20 | length 6.2
  Top Layer w0.254: U9.20 33.025,30 34.9,31.875 v1(34.9,32.6)
  Bottom Layer w0.254: U3.32 34.9,34.55 v1(34.9,32.6)
pads on no net: PROG1.2 PROG1.6 PROG1.10 PROG1.12 PROG1.13 PROG1.14 R8.2 U1.1 U1.3 U1.5 U1.7 U1.8 U1.9 U1.12 U1.13 U1.18 U1.19 U1.20 U1.23 U1.24 U2.4 U2.6 U2.7 U3.2 U3.4 U3.5 U3.6 U3.8 U3.9 U3.11 U3.12 U3.13 U3.15 U3.17 U3.19 U3.21 U3.23 U3.28 U3.29 U3.30 U9.1 U9.2 U9.3 U9.18 U9.19 U9.22 U9.23 U9.27 U9.32 U9.33 U9.34 U9.35 U9.38

## Polygon pours and split planes (outlines as drawn)
GND on Bottom Layer "GND_L02_P000" (solid, remove dead copper, pour order 0): 0,55.194 0,0 55,0 55,55.881
GND on Top Layer "GND_L01_P002" (solid, remove dead copper, pour order 2): 55,0.096 55,55 0.079,55 0.079,-0.095

## Keep-outs
Keep-Out Layer:
  the board outline again, w0.01

## Other copper
Top Layer:
  pour cut-out: 0,27.8 19.773,53.892 1.6,51.4

## Silkscreen, mask and mechanical layers (free items; w line width, h text height)
Top Overlay:
  text "MOUNT" at 40,44.617 h1.52
  text "MOUNT" at 11.449,35.61 h1.52
  text "APSS-5 Team Rocket / Designed by T. Peck & J. Wittgen" at 3.155,33.435 h1.52 r53.2
  text "MOUNT" at 19.617,6.7 h1.52 r270